# Altium PCB smart-water-sensor.PcbDoc (part 5 of 5)
Units mm, origin at the board's own origin, x right, y up, seen from the top; angles counter-clockwise.
Board outline 124.33 x 108.9 mm, 4 copper layers (Top Layer, Layer 1, Layer 2, Bottom Layer), stack 0.603 mm thick; 150 components, 74 nets, 469 pads, 463 vias.
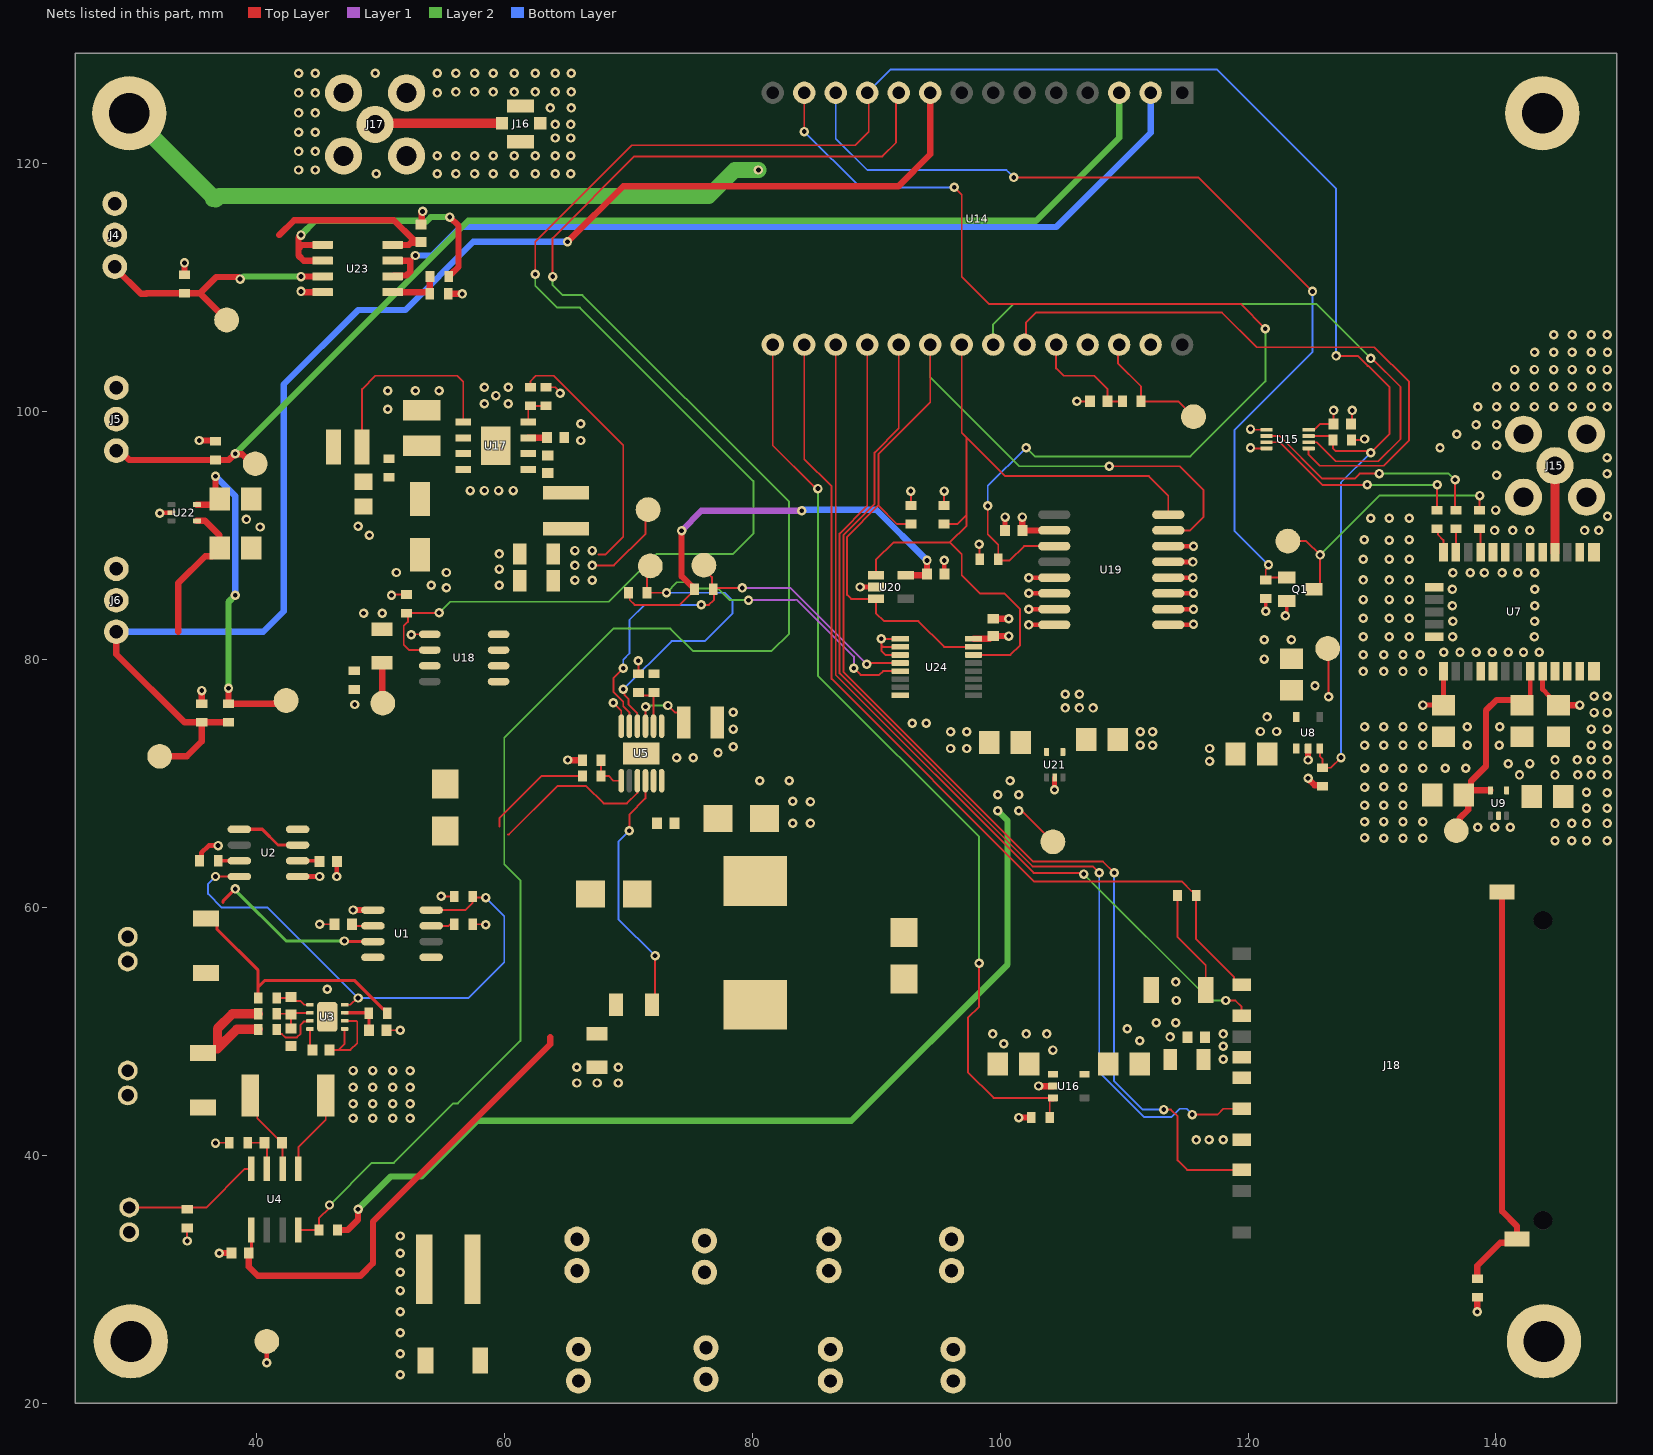
[diagram p4: the nets of this part, all layers, seen from the top]

## Via types
v1: diameter 0.762, hole 0.381, Top Layer to Bottom Layer, tented both sides, 463 vias

## Nets (pads, with @x,y where several pads share a name; then routed paths per layer and width w, separated by ;. In a path a pad name is that pad's centre, name@x,y a point inside that pad or via, vN(x,y) a via of type N, cw(c..) or ccw(c..) an arc to the next point about the centre after c; other vN are vias at no path point)
3.3V: C21.1 C34.1 C35.1 C37.1 C40.1 R9.2 R29.2 R30.2 R31.2 R32.1 R33.1 TP8.1 U15.8 U19.2 U20.5 U21.5 U24.16 | length 129.3
  Top Layer w0.152: R32.1@70.014,85.399 70.124,85.289 70.124,84.809 70.515,84.419 74.15,84.419 R33.1@75.25,85.519 ; v1(92.8,93.6) 92.804,93.596 R31.2@92.804,92.438 ; R30.2@95.471,92.438 95.471,93.4 95.5,93.429 v1(95.5,93.6) ; v1(98.3,89.3) 98.35,89.25 R29.2@98.35,88.1 ; v1(101.5,67.8) 101.617,67.683 101.879,67.683 TP8.1@104.262,65.3 ; U15.8@124.89,98.54 124.964,98.614 125.405,98.614 125.791,99 C21.1@126.5,99 ; C21.1@126.9,99 v1(126.9,100.1)
  Top Layer w0.508: R9.2@46.547,33.985 47.366,33.985 48.2,34.819 v1(48.2,35.65) ; v1(74.3,90.4) 74.3,86.721 75.154,85.867 75.254,85.867 75.35,85.771 R33.1@75.35,85.671 ; U20.5@92.386,86.802 94.002,86.802 C34.1@94.1,86.9 v1(94.1,88) ; U24.16@97.85,81.675 C40.1@99.166,81.675 ; C40.1@99.441,81.9 v1(100.7,81.9) ; v1(101.8,91.5) 101.792,91.492 C35.1@101.792,90.412 101.804,90.424 U19.2@104.366,90.424
  Layer 1 w0.508: v1(74.3,90.4) 75.9,92 v1(84,92)
  Layer 2 w0.508: v1(48.2,35.65) 50.85,38.3 53.3,38.3 57.8,42.8 88,42.8 100.6,55.4 100.6,67 v1(99.8,67.8)
  Bottom Layer w0.508: v1(84,92) 84.1,92.1 90,92.1 v1(94.1,88)
  other v1: 99.8,69.1 101.5,69.1 100.8,70.231
3.3V-EXT: C38.1 R34.2 TP14.1 U22.5 | length 28
  Top Layer w0.508: U22.5@35.2,92.5 36.562,92.5 C38.1@37.026,92.964 36.7,93.29 v1(36.7,94.8) ; v1(37.751,77.7) R34.2@37.751,76.439 42.139,76.439 TP14.1@42.4,76.7
  Layer 2 w0.508: v1(37.751,77.7) 37.751,84.65 v1(38.301,85.2)
  Bottom Layer w0.508: v1(36.7,94.8) 38.301,93.199 v1(38.301,85.2)
3.3V-GPS: C14.1 C15.1 C16.1 TP2.1 U7.1 U7.9 U8.5 | length 13.3
  Top Layer w0.152: TP2.1@126.429,80.9 126.5,80.829 v1(126.5,77)
  Top Layer w0.381: v1(134.112,76.333) 134.114,76.336 135.759,76.336 C15.1@135.763,76.332 C15.1@135.763,76.332 U7.1@135.764,79.046 ; U7.9@143.764,79.046 143.764,77.597 144.3,77.061 144.3,76.961 144.934,76.327 C14.1@145.034,76.327
  Top Layer w0.508: C14.1@145.034,76.327 146.758,76.327 v1(146.764,76.333)
  other v1: 125.405,77.9
3.3V-GPS-BACKUP: C13.1 C18.1 TP3.1 U7.8 U9.5 | length 19.1
  Top Layer w0.381: C13.1@142.129,76.327 142.764,76.961 U7.8@142.764,79.046
  Top Layer w0.508: TP3.1@136.8,66.2 137.085,66.485 137.085,67.221 137.764,67.9 137.764,69.103 137.596,69.27 C18.1@137.779,69.453 ; U9.5@139.558,69.453 C18.1@137.779,69.453 ; C13.1@142.129,76.327 141.707,76.75 140.05,76.75 139.2,75.9 139.2,71.4 137.985,70.185 137.985,69.659 C18.1@137.779,69.453
5V: C17.1 C19.1 C23.1 C30.2 C31.2 C36.1 L4.2 R26.2 TP6.1 U8.1 U9.4 U14.27 U16.1 U18.5 U18.6 U18.7 U18.8 U21.4 | length 29.5
  Top Layer w0.152: R26.2@62.103,101.969 62.114,101.98 62.114,102.458 62.556,102.9 64.002,102.9 69.6,97.302 69.6,89.92 68.148,88.468 67.6,88.468 ; C31.2@63.961,86.36 C31.2@63.961,86.338 ; C30.2@63.961,88.519 C30.2@64.012,88.468 ; C31.2@64.435,85.671 63.961,86.144 C31.2@63.961,86.338 ; C31.2@64.435,85.865 C31.2@63.961,86.338 ; v1(67.1,87.6) 68.835,87.6 71.4,90.165 71.4,91.9 TP6.1@71.6,92.1
  other v1: 104.262,48.5 102.1,49.8 103.756,49.8 141.9,70.7 141,71.591 142.732,71.615 121,74.2 122.3,74.2 121.539,75.379 105.25,76.1 106.4,76.1 107.5,76.1 105.25,77.2 106.4,77.2 65.7,86.4 67.094,86.4 65.7,87.6 65.7,88.8 67.1,88.8
5V-EXT: C2.1 C33.2 C39.1 D13.2 J4.2 J5.2 J6.2 TP7.1 U18.3 U22.4 U23.8 | length 30.2
  Top Layer w0.508: 33.7,82.249 33.7,86.179 35.868,88.347 36.455,88.347 37.026,88.918 C2.1@37.026,89 37.026,90.032 35.858,91.2 U22.4@35.2,91.2 ; 41.85,114.253 43.042,115.445 51.086,115.445 52.679,113.852 53.134,113.852 C39.1@53.28,113.706 53.199,113.624 52.45,113.624 52.281,113.455 U23.8@50.995,113.455 ; C33.2@50.15,79.75 50.15,76.534 TP7.1@50.245,76.439
GND: C1.1 C2.2 C3.2 C5.2 C6.1 C8.1 C9.2 C11.1 C12.1 C13.2 C14.2 C15.2 C16.2 C17.2 C18.2 C19.2 C20.2 C21.2 C22.2 C23.2 C24.1 C25.1 C27.2 C28.1 C29.1 C30.1 C31.1 C32.1 C33.1 C34.2 C35.2 C36.2 C37.2 C38.2 C39.2 C40.2 D2.1 D3.1 D4.1 D5.1 D6.2 D10.1 D11.1 D13.1 GDT1.1 H1.1 H2.1 H3.1 H4.1 J3.1 J4.3 J5.3 J6.3 J11.2 J12.2 J13.2 J14.2 J15.G1 J15.G2 J15.G3 J15.G4 J16.1 J16.3 J16.4 J17.G1 J17.G2 J17.G3 J17.G4 J18.3 J18.6 L2.2 Q1.2 R1.1 R6.1 R7.1 R8.1 R10.2 R13.1 R15.1 R19.1 R20.1 R22.1 R24.1 R27.1 R28.1 R36.1 TP4.1 U1.1 U2.1 U3.5 U3.6 U3.9 U4.1 U5.6 U5.13 U7.4 U7.5 U7.10 U7.11 U7.12 U7.13 U7.14 U7.15 U7.18 U7.19 U7.21 U7.22 U7.27 U7.31 U8.2 U9.2 U14.25 U15.1 U15.4 U16.2 U17.6 U17.8 U17.9 U18.1 U19.5 U19.6 U19.7 U19.8 U19.9 U19.10 U19.11 U19.12 U19.13 U19.14 U20.2 U21.2 U22.2 U23.4 U24.1 U24.2 U24.3 U24.8 | length 147.7
  Top Layer w0.152: v1(34.416,33.099) D2.1@34.417,34.048 ; v1(36.7,41) 36.843,41 36.864,41.021 R10.2@37.808,41.021 ; U4.1@43.384,38.913 43.384,40.67 45.595,42.881 R8.1@45.595,44.847 R8.1@45.4,44.652 ; v1(45.1,58.65) C1.1@46.3,58.65 ; C5.2@45.912,48.514 46.642,48.514 ; U3.5@47.12,50.206 47.12,48.993 46.642,48.514 ; U3.6@47.12,50.856 48.044,50.856 48.133,50.767 48.133,49.058 47.589,48.514 46.642,48.514 ; C8.1@50.48,50.1 51.5,50.1 v1(51.6,50.1) ; v1(50.9,85.2) 50.95,85.25 R28.1@52.1,85.25 ; v1(52.5,82) 52.582,82 52.624,82.042 U18.1@53.989,82.042 ; v1(54.9,60.9) 55,60.9 R6.1@55.95,60.9 ; R1.1@57.45,58.65 58.45,58.65 v1(58.5,58.6) ; R27.1@63.373,101.969 64.114,101.969 64.5,101.583 v1(64.5,101.5) ; v1(68.8,76.529) 69.439,75.89 U5.6@69.439,74.631 ; R13.1@70.817,78.85 v1(70.817,79.9) ; v1(90.4,81.692) v1@90.413,81.679 ; U24.3@91.95,80.375 90.742,80.375 90.417,80.7 90.417,81.168 ; U24.2@91.95,81.025 90.56,81.025 90.417,81.168 ; U24.1@91.95,81.675 90.417,81.675 v1@90.413,81.679 ; v1(106.2,100.838) C20.2@107.25,100.838 ; v1(120.2,97.1) 120.26,97.04 U15.4@121.49,97.04 ; v1(120.2,98.6) 120.34,98.6 120.4,98.54 U15.1@121.49,98.54 ; C21.2@128.3,99 128.4,99.1 v1(128.4,100.1) ; R22.1@128.35,97.73 129.3,97.73 129.37,97.8 v1(129.4,97.8) ; v1@90.413,81.679 90.413,81.425 90.417,81.421 90.417,81.168
  Top Layer w0.254: v1@53.34,115.967 53.151,116.156 v1(53.406,116.156) ; v1(121.433,83.894) R19.1@121.433,84.928 ; v1(123.014,83.548) 123.111,83.646 123.111,83.832 123.127,83.847 Q1.2@123.127,84.728
  Top Layer w0.381: v1(32.2,91.8) 32.25,91.85 U22.2@33.15,91.85 ; R7.1@35.411,63.771 35.571,63.931 35.571,64.404 36.167,65 v1(36.911,65) ; v1@40.844,23.271 TP4.1@40.844,25 ; U2.1@43.328,62.501 v1(45.1,62.501) ; v1(46.487,62.501) C6.1@46.487,63.717 ; v1(88.7,85.856) 88.809,85.856 88.813,85.852 U20.2@89.986,85.852 ; C34.2@95.5,86.9 v1(95.5,88) ; C35.2@100.392,90.412 100.392,91.492 v1(100.4,91.5) ; v1(102.3,82.8) 102.304,82.804 U19.8@104.366,82.804 ; v1(102.3,84.074) U19.7@104.366,84.074 ; v1(102.3,85.344) U19.6@104.366,85.344 ; v1(102.3,86.6) 102.314,86.614 U19.5@104.366,86.614 ; v1(104.387,69.509) 104.387,70.486 U21.2@104.406,70.505 ; U19.9@113.566,82.804 115.558,82.804 v1(115.6,82.846) ; U19.10@113.566,84.074 v1(115.6,84.074) ; U19.11@113.566,85.344 v1(115.6,85.344) ; U19.12@113.566,86.614 v1(115.558,86.614) ; U19.13@113.566,87.884 v1(115.558,87.884) ; U19.14@113.566,89.154 v1(115.6,89.154)
  Top Layer w0.508: D3.1@34.2,111.05 v1(34.2,112) ; v1(35.4,97.676) 36.629,97.675 D4.1@36.7,97.604 ; D5.1@35.595,76.439 35.595,77.495 v1(35.6,77.5) ; v1(37,32.1) 37.031,32.131 C9.2@37.985,32.131 ; v1(43.6,109.7) 43.655,109.645 U23.4@45.345,109.645 ; v1(47.8,59.8) 47.807,59.793 U1.1@49.405,59.793 ; C39.2@53.34,115.445 v1@53.34,115.967 ; R36.1@55.49,109.51 56.589,109.51 v1(56.6,109.5) ; v1(65.11,71.9) 65.101,71.9 65.083,71.882 R15.1@66.306,71.882 ; C40.2@99.441,83.3 v1(100.7,83.3) ; v1(101.5,43.053) R24.1@102.501,43.053 ; v1(103.1,45.6) 103.107,45.593 U16.2@104.262,45.593 ; v1(124.841,70.439) 124.841,70.4 125.37,69.871 125.902,69.871 R20.1@125.998,69.775 ; v1(124.841,71.9) U8.2@124.841,72.829 ; v1(138.5,27.4) L2.2@138.5,28.55
  Layer 2 w1.27: H2.1@29.746,124.079 36.675,117.15 36.495,117.15 ; 36.725,117.1 37.025,117.4 76.5,117.4 78.6,119.5 v1(80.5,119.5)
  other v1: 51.6,22.3 40.845,23.27 51.6,24 51.6,25.7 51.6,27.4 51.6,29.1 51.6,30.576 51.6,32.1 51.6,33.5 115.812,41.25 116.856,41.263 118,41.263 47.8,43.008 49.391,43.008 51,43.008 52.4,43.008 47.8,44.18 49.391,44.18 51,44.18 52.4,44.18 47.8,45.5 49.391,45.5 51,45.5 52.4,45.5 65.858,45.843 67.483,45.843 69.204,45.843 52.4,46.821 47.8,46.847 49.391,46.847 51,46.847 65.84,47.123 69.204,47.123 118,47.752 118,48.8 100.3,49 111.262,49.25 113.712,49.563 99.4,49.8 118,49.8 110.248,50.215 112.6,50.7 114.178,50.7 114.2,52.5 45.72,53.4 114.178,54 144.764,65.378 146.111,65.378 147.308,65.378 148.964,65.378 129.4,65.619 130.943,65.6 132.5,65.6 134.112,65.6 138.531,66.485 139.914,66.485 141.154,66.485 144.764,66.781 146.111,66.781 147.308,66.781 148.964,66.781 83.263,66.802 84.7,66.802 129.4,66.921 130.943,66.937 132.5,66.921 134.112,66.921 147.304,68.011 148.964,68.011 129.4,68.25 130.943,68.25 132.5,68.25 84.7,68.533 83.263,68.581 148.964,69.27 147.304,69.294 129.4,69.711 130.943,69.733 132.5,69.711 80.6,70.231 82.98,70.231 144.764,70.7 146.589,70.7 147.7,70.7 148.964,70.7 129.4,71.241 130.943,71.241 132.5,71.241 134.112,71.241 135.916,71.241 137.571,71.241 116.9,71.802 144.764,71.908 146.556,71.908 147.7,71.9 148.964,71.908 73.9,72.082 75.25,72.082 77.241,72.476 96,72.831 97.3,72.831 116.9,72.831 78.462,72.981 111.3,73.1 112.3,73.1 129.4,73.1 130.943,73.1 132.5,73.1 134.112,73.1 137.692,73.1 140.262,73.1 147.7,73.1 148.964,73.1 96,74.179 97.3,74.179 111.3,74.179 112.3,74.179 78.462,74.4 147.7,74.4 148.964,74.4 129.4,74.59 130.943,74.59 132.5,74.59 134.112,74.59 137.692,74.59 140.3,74.59 92.919,74.866 94.048,74.866 147.914,75.728 148.964,75.728 78.462,75.743 47.938,76.381 147.914,77.043 148.964,77.043 129.3,79.046 130.943,79.046 132.5,79.046 134.114,79.046 121.3,80.046 129.3,80.4 130.943,80.4 132.5,80.4 133.903,80.4 135.8,80.6 137.1,80.6 138.4,80.6 139.7,80.6 141,80.6 142.224,80.6 143.5,80.6 121.3,81.6 123.5,81.6 129.3,81.846 131.4,81.846 133,81.846 136.499,81.846 143.104,81.846 136.531,83.1 143.114,83.1 129.3,83.344 131.4,83.344 133,83.344 48.65,83.74 50.15,83.74 136.492,84.344 143.136,84.344 129.3,84.846 131.4,84.846 133,84.846 136.492,85.678 143.136,85.678 55.334,85.805 54.1,86 59.6,86 129.3,86.428 131.4,86.428 133,86.428 136.531,87 137.923,87 139.069,87 140.497,87 141.764,87 143.136,87 51.3,87.029 55.334,87.029 59.6,87.307 129.3,88.1 131.4,88.1 133,88.1 59.6,88.529 131.4,89.636 129.37,89.666 133,89.666 49.12,90.029 139.891,90.424 141.35,90.424 142.732,90.424 147.149,90.424 148.3,90.424 40.3,90.7 48.2,90.766 39.2,91.312 129.9,91.4 131.4,91.4 133,91.4 149,91.561 139.972,92.063 57.246,93.638 58.4,93.638 59.539,93.638 60.73,93.638 140.05,94.885 148.964,95.002 148.964,96.278 135.488,97.1 138.4,97.303 140.05,97.303 66.169,97.675 136.84,98.183 138.4,98.943 140.05,98.943 66.169,99.029 50.6,100.203 138.531,100.4 140.05,100.4 141.5,100.4 143.104,100.4 144.653,100.4 146.145,100.4 147.7,100.4 148.964,100.4 58.4,100.649 60.308,100.649 59.326,101.302 50.6,101.7 52.832,101.7 54.74,101.7 58.4,101.969 60.308,101.969 140.05,102 141.5,102 143.104,102 144.653,102 146.145,102 147.7,102 148.964,102 141.5,103.4 143.104,103.4 144.653,103.4 146.145,103.4 147.7,103.4 148.964,103.4 143.114,104.8 144.653,104.8 146.145,104.8 147.7,104.8 149,104.8 144.653,106.2 146.145,106.2 147.7,106.2 148.964,106.2 49.678,119.2 54.6,119.2 56.1,119.2 57.6,119.2 59.1,119.2 60.8,119.2 62.5,119.2 64.1,119.2 65.369,119.2 43.4,119.5 44.75,119.5 54.6,120.639 56.1,120.639 57.6,120.639 59.1,120.639 60.8,120.639 62.5,120.639 64.1,120.639 65.369,120.639 43.4,121 44.75,121 64.1,122.079 65.369,122.079 43.4,122.544 44.75,122.544 64.1,123.179 65.369,123.179 43.4,124.101 44.75,124.101 63.7,124.504 65.4,124.504 43.4,125.719 44.75,125.719 54.6,125.719 56.1,125.795 57.6,125.795 59.1,125.795 60.8,125.795 62.5,125.795 64.1,125.795 65.4,125.795 43.4,127.3 44.75,127.3 49.578,127.3 54.6,127.3 56.1,127.3 57.6,127.3 59.1,127.3 60.8,127.3 62.5,127.3 64.1,127.3 65.4,127.3
NetC1_2: C1.2 U1.2 | length 1.8
  Top Layer w0.152: C1.2@47.7,58.65 47.827,58.523 U1.2@49.405,58.523
NetC3_1: C3.1 C4.2 R4.2 U3.2 | length 4.5
  Top Layer w0.152: R4.2@41.918,51.061 41.644,51.335 R4.2@41.644,51.435 42.734,51.435 C4.2@42.799,51.37 ; C3.1@42.799,50.231 42.749,50.231 42.799,50.281 C4.2@42.799,51.37 ; U3.2@44.32,51.506 42.935,51.506 C4.2@42.799,51.37
NetC4_1: C4.1 R3.2 U3.1 | length 3
  Top Layer w0.152: R3.2@41.644,52.705 42.734,52.705 C4.1@42.799,52.77 43.096,52.473 43.539,52.473 43.856,52.156 U3.1@44.32,52.156
NetC5_1: C5.1 U3.4 | length 1.8
  Top Layer w0.152: U3.4@44.32,50.206 44.32,48.706 C5.1@44.512,48.514
NetC6_2: C6.2 U2.2 | length 1.9
  Top Layer w0.254: U2.2@43.274,63.717 U2.2@43.328,63.771 45.032,63.771 C6.2@45.087,63.717
NetC7_1: C7.1 R10.1 U4.3 | length 3.5
  Top Layer w0.152: R10.1@39.308,41.021 C7.1@40.652,41.021 40.844,40.829 U4.3@40.844,38.913
NetC7_2: C7.2 D12.1 J2.1 R8.2 U4.2 | length 7
  Top Layer w0.152: R8.2@39.495,44.847 40.065,44.277 40.065,43.008 41.678,41.395 41.728,41.395 42.052,41.071 C7.2@42.052,41.021 42.114,40.959 U4.2@42.114,38.913
NetC8_2: C8.2 R2.1 U3.7 | length 3.3
  Top Layer w0.254: U3.7@47.12,51.506 49.032,51.506 R2.1@49.068,51.47 49.08,51.458 C8.2@49.08,50.1
NetC10_1: C10.1 D8.1 U5.11
NetC10_2: C10.2 D6.1 L1.1 U5.12
NetC20_1: C20.1 R21.1 U14.24 | length 9
  Top Layer w0.152: U14.24@104.521,105.41 104.521,103.5 105.121,102.9 107.6,102.9 108.65,101.85 C20.1@108.65,100.838 R21.1@109.867,100.838
NetC22_1: C22.1 C24.2 C25.2 D11.2 J18.4 R23.2 U16.5 | length 8.6
  Top Layer w0.152: R23.2@114.312,60.96 114.312,57.6 116.586,55.326 D11.2@116.586,53.34
NetC26_1: C26.1 U17.2
NetC26_2: C26.2 L4.1 U17.1
NetC27_1: C27.1 R25.1
NetC28_2: C28.2 C29.2 L3.2 R25.2 U17.5 U17.7 | length 16.7
  Top Layer w0.152: L3.2@48.528,97.155 48.528,101.828 49.6,102.9 56.197,102.9 56.684,102.413 U17.5@56.684,99.159
NetC32_2: C32.2 U17.3 | length 1.5
  Top Layer w0.508: U17.3@61.934,97.889 63.407,97.889 C32.2@63.435,97.917
NetD1_1: D1.1 D12.2 J1.1 J2.2 R4.1 R5.1 | length 9.3
  Top Layer w0.762: R5.1@40.144,50.165 38.413,50.165 36.864,48.616 36.864,50.231 38.068,51.435 R4.1@40.144,51.435
NetD1_2: D1.2 J1.2 R2.2 R3.1 U1.3 U2.3 U2.5 | length 39.8
  Top Layer w0.254: D1.2@35.953,59.123 36.303,59.123 36.811,58.615 36.811,58.265 40.144,54.933 40.144,53.592 ; 37.3,60.4 37.3,60.499 v1(38.301,61.5) ; U2.5@38.628,66.311 40.473,66.311 41.743,65.041 U2.3@43.328,65.041 ; R3.1@40.144,52.705 40.144,53.592 ; v1(47.1,57.3) 47.147,57.253 U1.3@49.405,57.253 ; R2.2@50.568,51.47 50.568,51.57 50.345,51.793 50.245,51.793 47.938,54.1 40.652,54.1 40.144,53.592
  Layer 2 w0.254: v1(38.301,61.5) 38.301,61.399 42.4,57.3 v1(47.1,57.3)
NetD2_2: D2.2 J3.2 U4.4 | length 11.4
  Top Layer w0.152: J3.2@29.745,35.798 34.365,35.798 34.365,35.6 34.417,35.548 34.517,35.548 34.767,35.798 35.953,35.798 39.068,38.913 U4.4@39.574,38.913
NetD3_2: D3.2 J4.1 TP9.1 U23.3 | length 21.7
  Top Layer w0.508: J4.1@28.575,111.713 28.575,111.625 30.69,109.51 31.11,109.51 31.15,109.55 D3.2@34.2,109.55 35.45,109.55 ; TP9.1@37.6,107.4 35.45,109.55 ; v1(38.684,110.7) 38.519,110.865 36.765,110.865 35.45,109.55 ; v1(43.6,110.9) 45.54,110.9 U23.3@45.575,110.865
  Layer 2 w0.508: v1(38.684,110.7) 38.753,110.7 38.953,110.9 v1(43.6,110.9)
NetD4_2: D4.2 J5.1 TP10.1 U14.3 | length 97.5
  Top Layer w0.508: J5.1@28.702,96.854 28.996,96.854 29.746,96.104 D4.2@36.7,96.104 37.786,96.104 v1(38.301,96.619) 38.346,96.574 38.856,96.574 39.63,95.8 TP10.1@39.9,95.8
  Layer 2 w0.508: v1(38.301,96.619) 57.082,115.4 102.9,115.4 109.601,122.101 U14.3@109.601,125.73
NetD5_2: D5.2 J6.1 R34.1 TP11.1 U14.9 | length 115.9
  Top Layer w0.508: J6.1@28.702,82.249 28.702,80.437 34.2,74.939 D5.2@35.595,74.939 ; TP11.1@32.2,72.2 34.395,72.2 35.595,73.4 D5.2@35.595,74.939 ; R34.1@37.751,74.939 D5.2@35.595,74.939 ; v1(65.1,113.7) 69.6,118.2 91.8,118.2 94.361,120.761 U14.9@94.361,125.73
  Bottom Layer w0.508: J6.1@28.702,82.249 40.549,82.249 42.2,83.9 42.2,102.2 48.2,108.2 52,108.2 57.5,113.7 v1(65.1,113.7)
NetD7_2: D7.2 D10.2 GDT1.2 J7.1 J8.1 J9.1 J10.1
NetJ7_2: J7.2 J11.1
NetJ8_2: J8.2 J12.1
NetJ9_2: J9.2 J13.1
NetJ10_2: J10.2 J14.1
NetJ15_P: J15.P U7.17 | length 7
  Top Layer w0.75: J15.P@144.653,95.643 144.764,95.532 U7.17@144.764,88.646
NetJ16_2: J16.2 J17.P | length 10.3
  Top Layer w0.75: J17.P@49.578,123.179 49.678,123.279 J16.2@59.803,123.279
NetJ18_1: J18.1 R23.1 U14.16 | length 73.4
  Top Layer w0.152: U14.16@84.201,105.41 84.201,96.171 86.4,93.972 86.4,78.44 102.75,62.09 114.682,62.09 115.438,61.334 115.538,61.334 115.812,61.06 R23.1@115.812,60.96 115.812,57.438 118.853,54.397 118.853,54.187 119.276,53.763 J18.1@119.487,53.763
NetJ18_2: J18.2 U14.17 | length 71.2
  Top Layer w0.152: U14.17@86.741,105.41 86.741,78.759 102.7,62.8 106.65,62.8 v1(106.75,62.7) ; v1(118.2,52.5) 118.987,52.5 119.487,52 J18.2@119.487,51.263
  Layer 2 w0.152: v1(106.75,62.7) 116.95,52.5 v1(118.2,52.5)
NetJ18_5: J18.5 U14.18 | length 84.8
  Top Layer w0.152: U14.18@89.281,105.41 89.281,92.4 87.046,90.165 87.046,78.885 102.621,63.31 107.003,63.31 107.012,63.3 107.5,63.3 v1(108,62.8) ; v1(115.5,43.3) 117.537,43.3 118,43.763 J18.5@119.487,43.763
  Bottom Layer w0.152: v1(108,62.8) 108,46.7 111.61,43.09 113.802,43.09 114.475,43.763 115.037,43.763 v1(115.5,43.3)
NetJ18_7: J18.7 U14.19 | length 89
  Top Layer w0.152: U14.19@91.821,105.41 91.821,98.652 89.876,96.707 89.876,92.564 87.351,90.039 87.351,79.012 102.662,63.7 108.3,63.7 v1(109.2,62.8) ; v1(113.2,43.7) 113.778,43.7 114.312,43.166 114.312,39.6 115.079,38.833 J18.7@119.487,38.833
  Bottom Layer w0.152: v1(109.2,62.8) 109.2,46 111.5,43.7 v1(113.2,43.7)
NetJ18_Shield: J18.Shield L2.1 | length 33.6
  Top Layer w0.508: L2.1@138.5,30.05 138.5,31.1 140.349,32.949 141.383,32.949 J18.Shield@141.697,33.263 141.7,33.266 141.7,34.3 140.497,35.503 J18.Shield@140.497,61.263
NetL1_2: L1.2 R12.1 U5.10 | length 20.3
  Top Layer w0.152: v1(70.089,66.192) 70.089,67.5 71.389,68.8 U5.10@71.389,70.231 ; R12.1@71.92,52.16 72.164,52.404 v1(72.164,56.1)
  Bottom Layer w0.152: v1(70.089,66.192) 69.204,65.307 69.204,59.06 v1(72.164,56.1)
NetQ1_1: Q1.1 R19.2 U14.12 | length 76.1
  Top Layer w0.152: v1(101.1,118.9) 116,118.9 v1(125.2,109.7) ; v1(121.65,87.646) 121.65,87.481 121.433,87.264 R19.2@121.433,86.428 121.633,86.628 Q1.1@123.127,86.628
  Bottom Layer w0.152: U14.12@86.741,125.73 86.741,122.04 89.281,119.5 100.5,119.5 100.7,119.3 v1(101.1,118.9) ; v1(121.65,87.646) 118.9,90.396 118.9,98.5 125.2,104.8 v1(125.2,109.7)
NetQ1_3: Q1.3 R16.1 TP1.1 | length 22.1
  Top Layer w0.152: TP1.1@123.214,89.561 124.701,89.561 v1(125.814,88.448) 125.814,86.102 125.39,85.678 Q1.3@125.327,85.678 ; R16.1@138.684,92.063 v1(138.684,93.234)
  Layer 2 w0.152: v1(125.814,88.448) 130.6,93.234 v1(138.684,93.234)
NetR1_2: R1.2 U1.7 | length 1.8
  Top Layer w0.152: U1.7@54.105,58.523 55.509,58.523 R1.2@55.763,58.777
NetR5_2: R5.2 U3.3 | length 4
  Top Layer w0.152: R5.2@41.656,50.165 41.656,50.065 41.93,49.791 42.066,49.791 42.327,49.53 43.271,49.53 43.561,49.82 43.561,50.546 43.815,50.8 44.264,50.8 U3.3@44.32,50.856
NetR6_2: R6.2 U1.8 U2.8 U3.8 | length 44.5
  Top Layer w0.152: v1(36.7,62.501) U2.8@38.628,62.501 ; U3.8@47.12,52.156 47.589,52.156 48.133,52.7 v1(48.2,52.7) ; U1.8@54.105,59.793 56.843,59.793 57.45,60.4 R6.2@57.45,60.9 57.55,60.8 v1(58.5,60.8)
  Bottom Layer w0.152: v1(36.7,62.501) 36.1,61.901 36.1,61.1 37.2,60 40.9,60 v1(48.2,52.7) 57.1,52.7 60,55.6 60,59.3 v1(58.5,60.8)
NetR7_2: R7.2 U2.7 | length 1.7
  Top Layer w0.254: R7.2@36.911,63.771 U2.7@38.628,63.771
NetR9_1: R9.1 U4.8 U14.10 | length 153.6
  Top Layer w0.152: U4.8@43.384,33.985 R9.1@45.047,33.985 45.047,34.933 45.912,35.798 45.912,35.988 v1(45.9,36) ; v1(63.9,110.9) 63.9,114 70.5,120.6 90.5,120.6 91.6,121.7 91.6,125.509 U14.10@91.821,125.73
  Layer 2 w0.152: v1(45.9,36) 49.3,39.4 51.1,39.4 55.9,44.2 56.253,44.2 61.3,49.247 61.3,62.2 60,63.5 60,73.7 68.8,82.5 73.4,82.5 75.2,80.7 81.58,80.7 82.98,82.1 82.98,92.72 66.3,109.4 64.7,109.4 63.9,110.2 v1(63.9,110.9)
NetR11_1: R11.1 R13.2 U5.2 | length 3.8
  Top Layer w0.152: R13.2@70.817,77.12 72.077,77.12 72.039,77.082 U5.2@72.039,74.631
NetR14_1: R14.1 R15.2 U5.7 | length 3.1
  Top Layer w0.152: R15.2@67.806,71.882 R14.1@67.806,70.612 68.419,70.612 68.8,70.231 U5.7@69.439,70.231
NetR16_2: R16.2 U7.23 | length 2
  Top Layer w0.152: R16.2@138.684,90.563 138.764,90.483 U7.23@138.764,88.646
NetR17_1: R17.1 U15.2 | length 20
  Top Layer w0.152: U15.2@121.49,98.04 122.544,98.04 125.984,94.6 128.592,94.6 129,95.008 v1(130.576,95.008) ; R17.1@136.39,92.337 136.664,92.063 R17.1@136.764,92.063 136.7,92.127 v1(136.7,94.5)
  Layer 2 w0.152: v1(130.576,95.008) 136.192,95.008 v1(136.7,94.5)
NetR17_2: R17.2 U7.25 | length 1.9
  Top Layer w0.152: U7.25@136.764,88.646 R17.2@136.764,90.563
NetR18_1: R18.1 U15.3 | length 17.3
  Top Layer w0.152: U15.3@121.49,97.54 122.544,97.54 125.984,94.1 v1(129.608,94.1) ; R18.1@135.155,92.063 R18.1@135.255,92.063 135.255,94.093 v1(135.262,94.1)
  Layer 2 w0.152: v1(129.608,94.1) v1(135.262,94.1)
NetR18_2: R18.2 U7.26 | length 2.1
  Top Layer w0.152: R18.2@135.255,90.563 135.326,90.492 135.326,90.074 135.764,89.636 U7.26@135.764,88.646
NetR20_2: R20.2 R22.2 R28.2 U8.3 U14.11 U15.7 U18.2 | length 203.7
  Top Layer w0.152: R28.2@52.1,83.75 54.45,83.75 54.547,83.847 54.673,83.847 v1(54.74,83.78) ; R28.2@52.319,83.705 52.219,83.705 52.219,83.05 51.89,82.721 51.89,81.21 52.328,80.772 U18.2@53.989,80.772 ; v1(62.5,111.1) 62.5,113.7 70.3,121.5 88.3,121.5 89.4,122.6 89.4,125.611 U14.11@89.281,125.73 ; U15.7@124.89,98.04 126.576,98.04 R22.2@126.85,97.766 ; U8.3@125.791,72.829 125.791,72.2 125.998,71.993 R20.2@125.998,71.275 126.675,71.275 v1(127.5,72.1) ; R22.2@126.85,97.73 126.85,97.051 127.084,96.817 129.506,96.817 ; v1(127.1,104.5) 128.838,104.5 129.647,103.69 129.71,103.69 131.4,102 131.4,98.2 v1(129.9,96.7) 129.783,96.817 129.506,96.817
  Layer 2 w0.152: v1(54.74,83.78) 55.628,84.668 68.425,84.668 72.286,88.529 78.462,88.529 80.1,90.167 80.1,94.4 66.1,108.4 64.273,108.4 62.5,110.173 v1(62.5,111.1)
  Bottom Layer w0.152: U14.11@89.281,125.73 91.151,127.6 117.5,127.6 127.1,118 v1(127.1,104.5) ; v1(127.5,72.1) 127.5,94.3 v1(129.9,96.7)
NetR21_2: R21.2 TP5.1 U14.26 | length 10.1
  Top Layer w0.152: U14.26@109.601,105.41 109.5,105.309 109.5,103.9 111.367,102.033 R21.2@111.367,100.838 114.362,100.838 TP5.1@115.6,99.6
NetR24_2: R24.2 U14.15 U16.3 | length 76.4
  Top Layer w0.152: U14.15@81.661,105.41 81.661,97.274 84.956,93.979 85.135,93.8 v1(85.3,93.8) ; v1(98.3,55.5) 98.3,52 97.4,51.1 97.4,46.717 99.474,44.643 U16.3@104.137,44.643 ; R24.2@104.001,43.053 U16.3@104.001,44.444 ; U16.3@104.262,44.643 U16.3@104.2,44.643 ; U16.3@104.001,44.444 104.367,44.444 104.215,44.596 U16.3@104.184,44.627 ; U16.3@104.001,44.444 U16.3@104.184,44.627 ; U16.3@104.001,44.444 103.938,44.444 U16.3@104.137,44.643 ; U16.3@104.137,44.643 U16.3@104.168,44.643 ; U16.3@104.168,44.643 U16.3@104.2,44.643 ; U16.3@104.168,44.643 U16.3@104.184,44.627 ; U16.3@104.184,44.627 U16.3@104.2,44.643
  Layer 2 w0.152: v1(85.3,93.8) 85.3,78.7 98.3,65.7 v1(98.3,55.5)
NetR26_1: R26.1 R27.2 U17.4 | length 2.7
  Top Layer w0.152: U17.4@61.934,99.159 61.934,100.3 R26.1@62.103,100.469 R27.2@63.373,100.469
NetR29_1: R29.1 U14.13 U19.3 | length 92.8
  Top Layer w0.152: v1(84.201,122.6) U14.13@84.201,125.73 ; v1(96.3,118.1) 96.901,117.499 96.901,110.9 99.101,108.7 119.4,108.7 v1(121.4,106.7) ; v1(99,92.4) 99,90.1 99.85,89.25 R29.1@99.85,88.1 99.95,88 100.774,88 101.928,89.154 U19.3@104.366,89.154
  Layer 2 w0.152: v1(102.092,97.1) 102.792,96.4 115.35,96.4 121.4,102.45 v1(121.4,106.7)
  Bottom Layer w0.152: v1(84.201,122.6) 88.701,118.1 v1(96.3,118.1) ; v1(99,92.4) 99,94.008 v1(102.092,97.1)
NetR30_1: R30.1 U14.21 U19.16 U20.1 U24.14 | length 62.2
  Top Layer w0.152: U20.1@89.986,86.802 89.986,88.043 91.4,89.457 95.952,89.457 ; R30.1@95.471,90.938 96.544,90.938 97.3,91.694 ; U14.21@96.901,105.41 96.901,98.299 97.3,97.9 ; U24.14@97.85,80.375 100.824,80.375 101.617,81.168 101.617,84.074 100.347,85.344 98.359,85.344 96.901,86.802 96.901,88.508 95.952,89.457 ; U19.16@113.566,91.694 113.566,93.234 112,94.8 100.4,94.8 97.3,97.9 ; 95.952,89.457 97.3,90.805 97.3,91.694 ; 97.3,91.694 97.3,97.9
NetR31_1: R31.1 U14.20 U19.15 U20.3 U24.15 | length 72.7
  Top Layer w0.152: R31.1@92.804,90.938 91.681,90.938 90.181,92.438 ; U14.20@94.361,105.41 94.361,100.761 90.181,96.581 90.181,92.438 ; U24.15@97.85,81.025 95.475,81.025 93.4,83.1 90.64,83.1 89.986,83.754 U20.3@89.986,84.902 87.971,84.902 87.655,85.218 87.655,89.912 90.181,92.438 ; v1(108.8,95.6) 114.5,95.6 116.4,93.7 116.4,91.5 115.324,90.424 U19.15@113.566,90.424
  Layer 2 w0.152: U14.20@94.361,105.41 94.361,102.783 101.544,95.6 v1(108.8,95.6)
NetR32_2: R32.2 TP12.1 U5.4 U24.5 | length 48.3
  Top Layer w0.152: v1(69.6,77.6) 69.702,77.498 69.702,77.144 70.019,76.827 70.019,76.381 70.723,75.677 70.723,74.647 U5.4@70.739,74.631 ; TP12.1@71.78,87.558 71.514,87.292 R32.2@71.514,85.399 v1(73.087,85.399) ; v1(88.2,79.3) 88.74,78.76 90.241,78.76 90.556,79.075 U24.5@91.95,79.075
  Layer 1 w0.152: v1(79.7,84.8) 83.445,84.8 83.479,84.833 83.605,84.833 88.2,80.238 v1(88.2,79.3)
  Layer 2 w0.152: v1(73.087,85.399) 73.929,86.241 74.8,86.241 75.312,85.729 77.241,85.729 78.17,84.8 v1(79.7,84.8)
  Bottom Layer w0.152: v1(69.6,77.6) 73.5,81.5 76.181,81.5 78.4,83.719 78.4,84.799 77.8,85.399 v1(73.087,85.399)
NetR33_2: R33.2 TP13.1 U5.5 U24.4 | length 38.1
  Top Layer w0.152: v1(69.595,79.304) 68.8,78.509 68.8,77.391 69.595,76.596 69.595,76.237 70.089,75.743 U5.5@70.089,74.631 ; v1(75.9,84.419) 76.513,84.419 76.902,84.808 76.902,85.618 R33.2@76.85,85.671 ; TP13.1@76.1,87.619 76.1,87.307 76.75,86.657 76.75,85.805 76.772,85.783 v1(79.2,85.783) ; v1(89.237,79.632) 89.33,79.725 U24.4@91.95,79.725
  Layer 1 w0.152: v1(79.2,85.783) 83.086,85.783 v1(89.237,79.632)
  Bottom Layer w0.152: v1(69.595,79.304) 69.595,79.995 70.1,80.5 70.1,83.2 71.319,84.419 v1(75.9,84.419) v1@76.1,84.419
NetR35_1: R35.1 R36.2 U23.5 | length 4.6
  Top Layer w0.508: U23.5@50.995,109.645 53.894,109.645 R36.2@53.99,109.549 ; R36.2@53.895,109.605 R36.2@53.99,109.51 R36.2@53.99,109.549 ; R35.1@54.007,110.9 53.99,110.883 R36.2@53.99,109.549
NetR35_2: R35.2 U23.1 U23.2 | length 24
  Top Layer w0.508: v1(43.6,114.253) 43.4,114.053 43.4,113.157 ; U23.2@45.345,112.185 43.815,112.185 43.4,112.6 43.4,113.157 ; U23.1@45.345,113.455 43.698,113.455 43.4,113.157 ; R35.2@55.507,110.9 55.507,111 55.603,111.096 55.703,111.096 56.311,111.704 56.311,114.989 v1(55.6,115.7)
  Layer 2 w0.508: v1(43.6,114.253) 44.747,115.4 53.049,115.4 53.08,115.369 53.732,115.369 54.064,115.7 v1(55.6,115.7)
NetU1_4: U1.4 U2.4
NetU14_2: U14.2 U23.6 U23.7 | length 70.5
  Top Layer w0.508: U23.6@50.995,110.915 51.066,110.986 52.103,110.986 52.417,111.3 52.417,112.185 U23.7@50.995,112.185
  Bottom Layer w0.508: v1(52.832,112.6) 54.2,112.6 56.5,114.9 104.541,114.9 112.141,122.5 U14.2@112.141,125.73
NetU14_22: U14.22 U15.6 | length 51
  Top Layer w0.152: U15.6@124.89,97.54 125.544,97.54 127.084,96 130.513,96 132.3,97.787 132.3,102 130,104.3 v1(129.9,104.3)
  Layer 2 w0.152: U14.22@99.441,105.41 99.441,107.041 101.1,108.7 125.5,108.7 v1(129.9,104.3)
NetU14_23: U14.23 U15.5 | length 49.9
  Top Layer w0.152: U14.23@101.981,105.41 102.092,105.521 102.092,107.2 102.892,108 117.9,108 120.7,105.2 130.2,105.2 133,102.4 133,97.7 130.943,95.643 125.791,95.643 124.89,96.544 U15.5@124.89,97.04
VBAT: C9.1 C12.2 D8.2 D9.2 R12.2 R14.2 U1.5 U4.5 U5.9 | length 61
  Top Layer w0.152: 59.6,66.541 59.6,67.2 63.012,70.612 R14.2@66.306,70.612 ; 60.308,65.9 60.379,65.9 64.279,69.8 66.6,69.8 68.006,68.394 69.894,68.394 70.739,69.239 U5.9@70.739,70.231 ; C12.2@67.483,49.823 C12.2@67.716,50.056
  Top Layer w0.254: C9.1@39.385,32.131 39.619,32.365 39.619,33.94 U4.5@39.574,33.985
  Top Layer w0.508: C9.1@39.385,32.131 39.385,31.015 40.1,30.3 48.4,30.3 49.4,31.3 49.4,34.663 63.713,48.976 63.713,49.53
VCC: C11.2 D7.1 D9.1 L3.1 R11.2 U5.1 U5.3 | length 5.4
  Top Layer w0.152: U5.3@71.389,74.631 71.389,76.046 71.4,76.057 v1(71.4,76.2) ; v1(73.2,76.3) 73.78,75.72 73.995,75.72 74.469,75.247 C11.2@74.469,74.93
  Layer 2 w0.152: v1(71.4,76.2) 71.5,76.3 v1(73.2,76.3)
pads on no net: J18.8 J18.9 J18.CD J18.MH1 J18.MH2 J18.WP U1.6 U2.6 U4.6 U4.7 U5.8 U7.2 U7.3 U7.6 U7.7 U7.16 U7.20 U7.24 U7.28 U7.29 U7.30 U8.4 U9.1 U9.3 U14.1 U14.4 U14.5 U14.6 U14.7 U14.8 U14.14 U14.28 U16.4 U18.4 U19.1 U19.4 U20.4 U21.1 U21.3 U22.1 U22.3 U24.6 U24.7 U24.9 U24.10 U24.11 U24.12 U24.13

## Polygon pours and split planes (outlines as drawn)
VBAT on Top Layer "GND" (solid, pour order 226): 53,56.3 59.066,56.3 59.6,56.834 59.6,61.401 58.5,62.501 52.5,62.501 52.5,67.5 60.956,67.5 60.956,62.801 62.7,61.057 62.7,55.5 59.97,52.77 53,52.77
NetU1_4 on Top Layer "GND" (solid, pour order 224): 50.15,67.183 50.15,61.433 49.117,60.4 44.807,60.4 44.2,59.793 44.2,57.5 45.4,56.3 50.48,56.3 50.48,54.5 41.437,54.5 38.684,57.253 38.684,60.8 39.042,61.157 41.089,61.157 41.644,61.712 47.312,61.712 47.7,62.1 47.7,65.494 47.294,65.9 42.311,65.9 42.311,67.183
NetD1_2 on Top Layer "GND" (solid, pour order 222): 39.495,66.8 28.575,66.8 28.3,66.525 28.3,56.9 38.068,56.9 37.985,56.983 37.985,60.815 37.3,61.5 34.5,61.5 34.5,64 36.2,65.7 39.495,65.7
GND on Top Layer "GND" (solid, pour order 212): 91.1,77.35 94.7,77.35 94.7,74.93 94.7,74.205 92.828,74.205 91.1,75.933
5V on Top Layer "Top Layer-5V" (solid, pour order 62): 58.9,82.8 63.012,82.8 63.012,89.12 62.1,90.032 62.1,91.5 67.6,91.5 67.75,91.35 67.75,83.661 61.496,77.407 58.9,77.407
5V-EXT on Top Layer "Top Layer-5V-EXT" (solid, pour order 60): 27.7,115.1 41.553,115.1 42.4,114.253 42.4,99.159 41.3,99.159 41.1,99.359 41.1,112.9 40.5,113.5 27.6,113.5 27.6,115
NetC7_2 on Top Layer "Top Layer-NetC7_2" (solid, pour order 54): 28.601,45.5 38.684,45.5 38.684,46.847 40.6,46.847 40.652,46.795 40.652,42.4 28.601,42.4
NetD1_1 on Top Layer "Top Layer-NetD1_1" (solid, pour order 4): 28.575,56.3 37.985,56.3 37.985,46 28.575,46
GND on Top Layer "Top Layer-GND 5" (solid, pour order 210): 47.45,77.997 48.439,77.997 48.439,75.743 47.45,75.743
GND on Top Layer "Top Layer-GND 6" (solid, pour order 208): 69.595,73.3 73.343,73.3 73.662,72.981 76.1,72.981 76.1,71.183 73.617,71.183 73.3,71.5 69.595,71.5
GND on Top Layer "Top Layer-GND 7" (solid, pour order 206): 45.047,53.773 46.45,53.773 46.45,50.1 46.415,50.065 45.047,50.065
VCC on Top Layer "Top Layer-VCC 4" (solid, pour order 204): 72.572,75.579 74.701,75.579 74.701,73.301 74.409,73.593 72.572,73.593
3.3V on Top Layer "Top Layer-3.3V" (solid, pour order 138): 100.9,72.422 100.9,71.183 99.117,69.4 99.117,67.316 101.376,67.316 102.5,67.316 102.5,72.422
GND on Top Layer "Top Layer-GND 8" (solid, pour order 202): 115.124,42.1 120.3,42.1 120.3,40.4 115.124,40.4
GND on Top Layer "Top Layer-GND 9" (solid, pour order 200): 98.7,50.34 100.8,50.34 100.8,46.279 100.775,46.253 98.7,46.253
GND on Top Layer "Top Layer-GND 10" (solid, pour order 198): 110.5,48.632 109.496,49.636 109.496,50.7 111,50.7 112.3,49.4 112.3,46.31 112.186,46.196 110.5,46.196
5V on Top Layer "Top Layer-5V 1" (solid, pour order 196): 101.5,50.34 104.8,50.34 104.8,46.225 104.762,46.263 101.5,46.263
NetC22_1 on Top Layer "Top Layer-NetC22_1" (solid, pour order 192): 106.4,48.8 109.496,48.8 109.496,45.804 109.707,45.593 116,45.593 116,48.2 116.05,48.15 117.3,48.15 117.3,44.3 108.7,44.3 107.2,45.8 106.3,45.8 106.3,48.7
GND on Top Layer "Top Layer-GND 11" (solid, pour order 190): 111.4,54.6 115,54.6 115,51.7 115.6,51.1 115.5,51 115.5,46.543 112.857,46.543 112.8,46.6 112.8,49.53 112.77,49.53 111.4,50.9
GND on Top Layer "Top Layer-GND 12" (solid, pour order 188): 117.5,50.3 118.5,50.3 118.5,48.1 117.6,48.1 117.5,48.2
GND on Top Layer "Top Layer-GND 13" (solid, pour order 186): 117.5,48.5 120.3,48.5 120.3,47.4 120.1,47.2 117.5,47.2
NetC22_1 on Top Layer "Top Layer-NetC22_1 1" (solid, pour order 184): 117.3,55.5 117.3,46.8 120.4,46.8 120.4,45.593 116,45.593 116,55.088 116.412,55.5
GND on Top Layer "Top Layer-GND 14" (solid, pour order 180): 120.4,82.344 124.814,82.344 124.841,82.317 124.841,79.046 120.4,79.046
GND on Top Layer "Top Layer-GND 15" (solid, pour order 178): 116,73.43 119.9,73.43 119.9,71.1 116,71.1
GND on Top Layer "Top Layer-GND 16" (solid, pour order 162): 149.6,106.9 149.6,64.7 146.289,64.7 128.35,64.7 128.35,90.986 144.264,106.9
5V on Top Layer "Top Layer-5V 2" (solid, pour order 160): 140.3,72.2 143.197,72.2 143.715,71.615 143.764,71.567 143.764,67.9 141.7,67.9 141,68.6 140.3,68.6
3.3V-GPS on Top Layer "Top Layer-3.3V-GPS" (solid, pour order 154): 122.544,78.5 127.084,78.5 127.084,76.327 122.549,76.327 122.544,76.332
3.3V-GPS on Top Layer "Top Layer-3.3V-GPS 1" (solid, pour order 150): 123.5,75 124.841,75 124.841,78.5 122.4,78.5 122.4,76.02 123.49,74.93 124.841,74.93
5V on Top Layer "Top Layer-5V 3" (solid, pour order 148): 120.4,75.9 121.881,75.9 124.2,73.581 124.2,71.4 120.4,71.4
GND on Top Layer "Top Layer-GND 17" (solid, pour order 144): 42.538,127.973 65.938,127.973 65.938,118.705 65.906,118.673 42.438,118.673 42.538,118.773
GND on Top Layer "Top Layer-GND 18" (solid, pour order 142): 64.9,47.7 69.964,47.7 69.964,44.959 64.9,44.959
GND on Top Layer "Top Layer-GND 19" (solid, pour order 134): 113,75 113,72.39 108.532,72.39 108.5,72.422 108.5,75
GND on Top Layer "Top Layer-GND 20" (solid, pour order 132): 95.3,74.93 100.1,74.93 100.1,71.93 95.3,71.93
3.3V on Top Layer "Top Layer-3.3V 1" (solid, pour order 130): 100.9,75.482 104.1,75.482 104.1,72.1 100.9,72.1
5V on Top Layer "Top Layer-5V 4" (solid, pour order 128): 104.6,78.7 105.9,78.7 108,76.6 108,72.581 107.682,72.263 104.6,72.263
VCC on Top Layer "Top Layer-VCC" (solid, pour order 44): 53.8,68.658 53.8,73.4 56.454,76.054 65.082,76.054 65.081,79.939 68.892,83.75 81.631,83.75 81.631,78.1 73.9,78.1 73.9,78.764 72.164,80.5 69.942,80.5 67.75,78.308 67.75,74.086 66.764,73.1 60.73,73.1 58.1,70.47 58.1,68.658
NetJ10_2 on Top Layer "Top Layer-NetJ10_2" (solid, pour order 120): 92.919,31.5 93.019,31.4 99.4,31.4 99.4,23.2 92.9,23.2 92.9,31.431 92.919,31.45
NetJ9_2 on Top Layer "Top Layer-NetJ9_2" (solid, pour order 118): 83,31.5 89.6,31.5 89.5,31.4 89.5,23.464 83.017,23.464 83,23.481
NetJ8_2 on Top Layer "Top Layer-NetJ8_2" (solid, pour order 116): 79.35,31.5 79.35,23.498 79.316,23.464 72.8,23.464 72.8,31.4 72.7,31.5
NetJ7_2 on Top Layer "Top Layer-NetJ7_2" (solid, pour order 112): 62.7,31.5 62.8,31.6 69.232,31.6 69.232,23.532 69.3,23.464 62.7,23.464
GND on Top Layer "Top Layer-GND 21" (solid, pour order 110): 54.6,34.4 54.6,21 50.6,21 50.6,34.4
GND on Top Layer "Top Layer-GND 22" (solid, pour order 106): 40.85,94.329 40.85,87.639 38.684,87.639 38.684,94.329
GND on Top Layer "Top Layer-GND 23" (solid, pour order 104): 53,47.4 53,42.517 45.595,42.517 45.595,47.4
NetC26_2 on Top Layer "Top Layer-NetC26_2" (solid, pour order 102): 62.707,92.345 67.257,92.345 67.257,95.6 62.707,95.6
NetC26_2 on Top Layer "Top Layer-NetC26_2 1" (solid, pour order 100): 61.301,95.6 66.764,95.6 66.764,94.701 61.301,94.701 61.301,95.58 61.281,95.6
NetC26_1 on Top Layer "Top Layer-NetC26_1" (solid, pour order 96): 61.261,96.94 61.301,96.9 64.114,96.9 64.114,96.201 61.261,96.201
GND on Top Layer "Top Layer-GND 24" (solid, pour order 94): 64.5,99.7 64.509,99.691 66.368,99.691 67.131,98.928 67.131,96.9 64.5,96.9
NetC28_2 on Top Layer "Top Layer-NetC28_2" (solid, pour order 76): 47.9,95.802 47.9,93.6 49.5,93.6 49.5,97.054 49.3,97.254 47.9,97.254 47.9,95.802
NetC28_2 on Top Layer "Top Layer-NetC28_2 1" (solid, pour order 74): 50.7,98.8 51.3,98.2 55.127,98.2 55.127,97.313 55.54,96.9 57.4,96.9 57.4,96.254 57.246,96.254 51.604,96.254 50.95,95.6 47.9,95.6 47.9,98.8
GND on Top Layer "Top Layer-GND 25" (solid, pour order 92): 57.884,95.35 60.745,95.35 60.768,95.327 60.768,102.462 57.884,102.462
GND on Top Layer "Top Layer-GND 26" (solid, pour order 90): 56.021,95.802 57.156,95.802 58.613,94.345 61.261,94.345 61.261,92.964 56.6,92.964 56.6,93.766 56.021,94.345
GND on Top Layer "Top Layer-GND 27" (solid, pour order 86): 54.1,99.681 55.8,97.982 55.8,97.369 57.4,97.369 57.4,98.5 56.021,98.5 54.821,99.7 54.1,99.7
GND on Top Layer "Top Layer-GND 28" (solid, pour order 84): 55.507,102.5 55.507,98.798 54.89,99.259 50.595,99.259 49.75,100.104 49.75,102.5
GND on Top Layer "Top Layer-GND 29" (solid, pour order 82): 50.7,90.032 56.197,90.032 56.2,90.029 56.2,85.25 53.78,85.25 52.67,86.36 50.7,86.36
NetC27_1 on Top Layer "Top Layer-NetC27_1" (solid, pour order 80): 50.15,95.121 50.213,95.058 55.127,95.058 55.127,91.2 54.902,91.425 50.15,91.425
GND on Top Layer "Top Layer-GND 30" (solid, pour order 78): 47.53,93.122 49.75,93.122 49.75,89.278 47.53,89.278
VCC on Top Layer "Top Layer-VCC 5" (solid, pour order 72): 43.95,99.394 43.95,107 67.131,107 85.7,88.431 85.7,73.905 82.965,73.905 80.24,76.63 80.24,87.443 64.383,103.3 49.1,103.3 47.2,101.4 47.2,95 43.9,95 43.9,99.344
GND on Top Layer "Top Layer-GND" (solid, pour order 70): 58.681,89.576 61.934,89.576 61.934,85.039 58.681,85.039
GND on Top Layer "Top Layer-GND 1" (solid, pour order 64): 48.2,84.3 51.3,84.3 51.3,81.7 48.2,81.7
5V-EXT on Top Layer "Top Layer-5V-EXT 1" (solid, pour order 58): 27.9,100.3 41.8,100.3 42.4,99.7 42.4,91 45.5,87.9 45.5,79.676 44.2,79.676 44.2,87.029 41.2,90.029 41.2,98.5 40.5,98.5 27.9,98.5
5V-EXT on Top Layer "Top Layer-5V-EXT 2" (solid, pour order 56): 52.1,79.9 51.7,80.3 36.1,80.3 30.6,85.8 26.3,85.8 26.3,83.7 30,83.705 34.7,79 54.6,79 54.6,79.9
VBAT on Top Layer "Top Layer-VBAT" (solid, pour order 36): 59.6,65.001 68.5,65.001 68.5,55 69.964,55 69.964,49 59.6,49
GND on Top Layer "Top Layer-GND 2" (solid, pour order 50): 43.539,49.3 43.539,47.123 43.815,46.847 45.4,46.847 45.4,49.1 45.5,49.2 47.12,49.2 47.12,42.973 46.547,42.4 42.052,42.4 42.052,49.286 42.066,49.3
NetD7_2 on Top Layer "Top Layer-NetD7_2" (solid, pour order 46): 61.3,32.1 97.4,32.1 99.6,34.3 99.6,42.1 96.6,45.1 96.6,55.5 87.9,55.5 87.9,41.3 62.4,41.3 56,34.9 56,21 61.3,21
VCC on Top Layer "Top Layer-VCC 1" (solid, pour order 42): 73.9,79.1 75.502,79.1 75.502,73.302 75.504,73.3 73.9,73.3
VCC on Top Layer "Top Layer-VCC 2" (solid, pour order 40): 71.82,79.1 75.504,79.1 75.504,77.804 75.5,77.8 71.6,77.8 71.6,78.88
GND on Top Layer "Top Layer-GND 3" (solid, pour order 38): 79.55,70.97 83.263,70.97 85.7,68.533 85.7,66.1 79.642,66.1 79.55,66.192
NetL1_2 on Top Layer "Top Layer-NetL1_2" (solid, pour order 34): 71.405,54.9 83,54.9 83,49 71.389,49 71.389,54.884
GND on Top Layer "Top Layer-GND 4" (solid, pour order 28): 76.587,76.529 78.6,76.529 79.55,75.579 79.55,72.831 78.6,71.881 76.587,71.882 76.587,76.477
VCC on Top Layer "Top Layer-VCC 3" (solid, pour order 26): 74.574,79.1 83.762,79.1 96.6,66.262 96.6,56.263 89.237,56.263 87.9,56.263 87.9,67.662 78.462,77.1 74.574,77.1
NetC10_1 on Top Layer "Top Layer-NetC10_1" (solid, pour order 22): 69.439,63.247 72.979,63.247 72.979,58.1 69.439,58.1
NetC10_2 on Top Layer "Top Layer-NetC10_2" (solid, pour order 16): 72.689,70.97 74.469,70.97 78.6,70.97 78.6,64.9 79.12,64.38 82.98,64.38 82.98,58.9 82.47,58.39 75.504,58.39 73.27,60.624 73.27,68.658 72.689,69.239 72.689,70.97 73.06,70.97
NetC10_1 on Top Layer "Top Layer-NetC10_1 1" (solid, pour order 10): 71.82,70.76 71.82,58.1 72.979,58.1 72.979,68.394 72.164,69.21 72.164,70.97 71.954,70.76
GND on Layer 1 "Layer 1-GND" (solid, pour order 52): 26,68 47,68 47,90 43,94 43,103 63.661,103 82,84.661 82,73 87,68 87,48 100,35 100,21 26,21
GND on Layer 1 "Layer 1-GND 1" (solid, pour order 166): 70.8,127.8 70.9,127.7 146.8,127.7 148.462,126.038 148.462,107.754 143.884,107.754 127.3,91.17 127.3,63.6 128.4,62.5 148,62.5 149.2,61.3 149.1,61.2 149.1,21.4 116.1,21.4 88.3,49.2 88.3,68.08 82.8,73.58 82.8,91.6 70.7,103.7 70.7,127.6
GND on Layer 1 "Layer 1-GND 5" (solid, pour order 170): 40.17,117.25 72.97,117.25 72.97,104.25 72.87,104.15 40.07,104.15 40.07,117.15
GND on Layer 1 "Layer 1-GND 7" (solid, pour order 108): 27.7,119.8 39,119.8 41.8,117.2 41.8,93.5 46.015,89.285 46.015,69.4 26,69.4 25.9,69.5 26,119.8
GND on Layer 1 "Layer 1-GND 2" (solid, pour order 176): 42.5,128 71.861,128 73.6,126.261 73.6,118.8 42.5,118.8
GND on Layer 1 "Layer 1-GND 3" (solid, pour order 174): 122.3,69.919 122.319,69.9 131.785,69.9 131.785,64.815 131.9,64.7 122.3,64.7
GND on Layer 1 "Layer 1-GND 4" (solid, pour order 172): 85.55,48.5 93.6,48.5 98.4,43.7 98.4,34.421 93.279,34.421 85.55,42.15
GND on Layer 1 "Layer 1-GND 6" (solid, pour order 164): 149.6,106.9 144.214,106.9 144.214,106.814 128.3,90.9 128.3,64.7 149.6,64.7
5V on Bottom Layer "Bottom Layer-5V 4" (solid, pour order 122): 64.8,89.5 84.4,89.5 87.1,86.8 87.1,78.7 105.9,78.7 107.8,76.8 107.8,75.5 88.1,75.5 82.2,81.4 82.2,86.4 68.8,86.4 67.5,85.1 64.8,85.1
5V on Bottom Layer "Bottom Layer-5V" (solid, pour order 194): 88.1,76.529 88.1,70.1 101.5,56.7 101.5,46.4 104.8,46.4 104.8,58 90.2,72.6 90.2,76.529
5V on Bottom Layer "Bottom Layer-5V 1" (solid, pour order 156): 120.4,74.179 120.4,63.9 122.2,62.1 138.1,62.1 140.8,64.8 143.8,64.8 143.8,71.5 143.1,72.2 140.3,72.2 140.3,69.3 142.1,67.5 142.1,66.4 141.5,65.8 138.5,65.8 136.6,63.9 125.3,63.9 122.8,66.4 122.8,74.2 120.421,74.2
5V on Bottom Layer "Bottom Layer-5V 2" (solid, pour order 146): 105.25,78.7 120.5,78.7 122.8,76.4 122.8,71.3 120.4,71.3 120.4,75.9 120.4,75.5 117,75.5 105.25,75.5
5V on Bottom Layer "Bottom Layer-5V 3" (solid, pour order 124): 76.308,89.008 76.3,99.9 71.7,104.5 71.7,111.7 111.3,111.7 113,110 113,104.2 111.2,104.2 111.2,109.3 75.1,109.3 74.1,108.3 74.1,104.7 78.8,100 78.8,89.008
3.3V on Layer 2 "Layer 2-3.3V" (solid, pour order 140): 102.5,67.3 99.1,67.3 99.1,80.1 87.7,80.1 87.7,94.4 114.5,94.4 121.7,101.6 130.2,101.6 130.2,96.2 114.1,80.1 103.9,80.1 103.9,78.7 102.5,77.3
3.3V-GPS on Layer 2 "Layer 2-3.3V-GPS" (solid, pour order 152): 124.5,78.5 133.4,78.5 134.4,77.5 147.304,77.5 147.304,75.2 127.6,75.2 126.5,76.3 124.5,76.3

## Silkscreen, mask and mechanical layers (free items; w line width, h text height)
Top Overlay:
  rectangle: 121.4,125.2 123.1,126.7
  lines w0.254: 53.1,118 55.4,118 55.4,123.2 55.2,123.4 ; 110.5,107.2 116.3,113 119.6,113 ; 110.817,123.9 115.817,118.9 116.117,118.9 119.4,118.9 ; 138.8,96.1 139.2,96.1 139.6,95.7 142.638,95.7 142.938,95.4
  text "JA" at 117.2,125.2 h2.54
  text "CELL" at 35.4,123.179 h2.54
  text "50 ohm" at 48.1,117.5 h1.52
  text "Turbidity" at 35,117.1 h2.54
  text "JA and JB" at 117.7,116.4 h2.54
  text "Connectors on this side of PCB" at 102.5,114 h2.54
  text "ARDUINO" at 86.5,111.679 h2.54
  text "BASE" at 138.764,109.7 h2.54 r90
  text "GPS" at 142.8,108.879 h2.54
  text "JB" at 117.2,104.6 h2.54
  text "TDS" at 35.4,101.828 h2.54
  text "50 ohm" at 134.066,95.7 h1.52
  text "1Wire" at 35.401,81.7 h2.54
  text "Battery 1" at 30.3,60.9 h2.54 r90
  text "Battery 2" at 26.818,50.515 h2.54
  text "ADC" at 28.7,38.9 h2.54
  text "SOLAR" at 71.021,37.67 h2.54
  text "SD" at 113.7,34.8 h2.54
  text "Smart Water Quality Sensor Mote" at 103.6,26 h2.54
  text "N.J . Kinar, M. Brinkmann, J. Pomeroy" at 104.5,23.7 h2.03
  text "University of Saskatchewan" at 105.7,21.1 h2.54

## Text inside footprints (layer, text, board x,y; h text height)
U4: Top Overlay "*" at 43.79,39.484 h1.27 r270; Mechanical 13 "*" at 42.635,38.379 h1.27 r270